# Altium PCB 咸味勺子.PcbDoc
Units mil, origin at the board's own origin, x right, y up, seen from the top; angles counter-clockwise.
Board outline 866.14 x 3005.27 mil, 2 copper layers (Top Layer, Bottom Layer); 64 components, 38 nets, 194 pads, 25 vias.
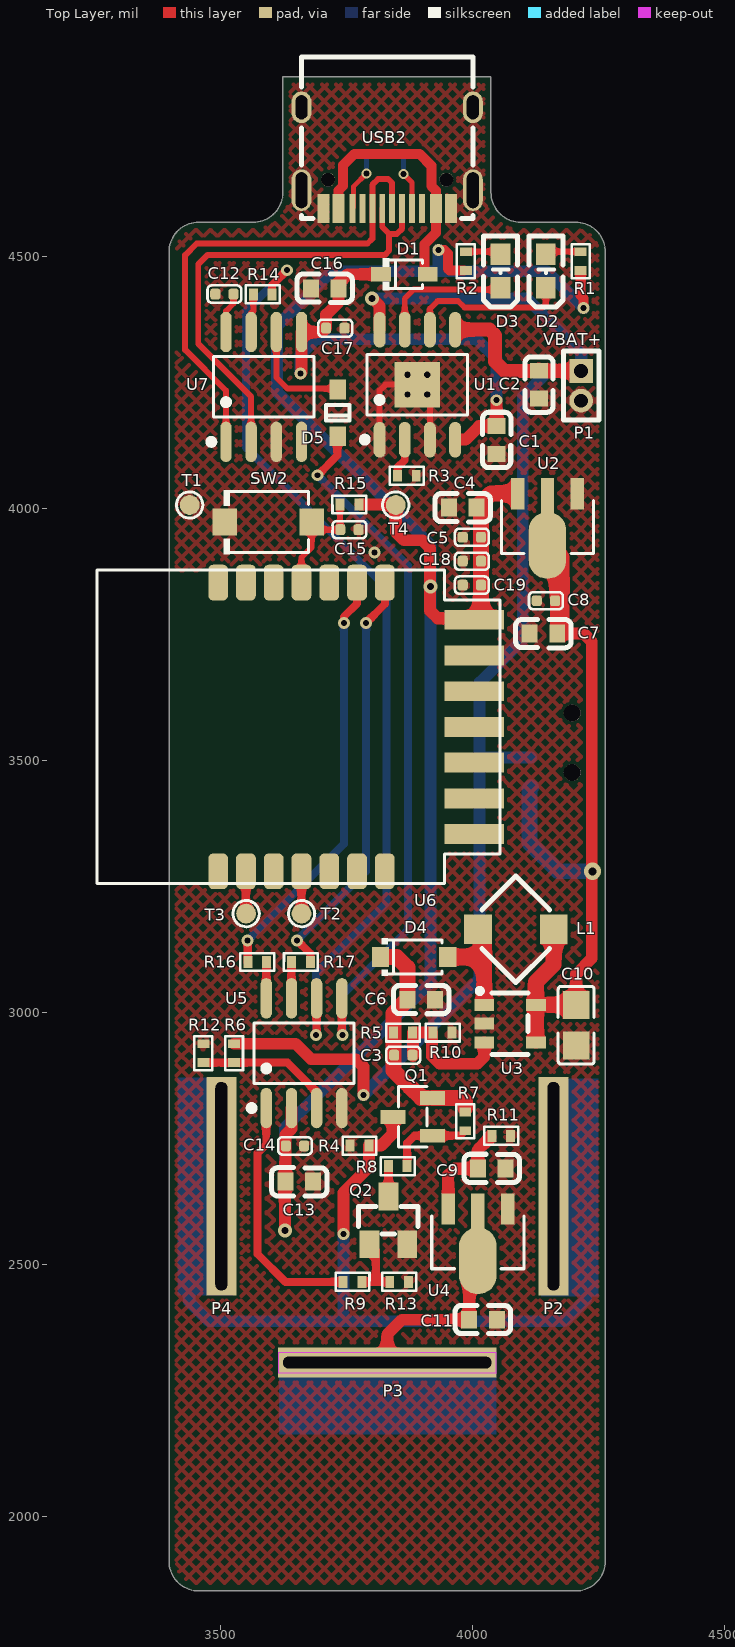
[diagram p0: Top Layer view]
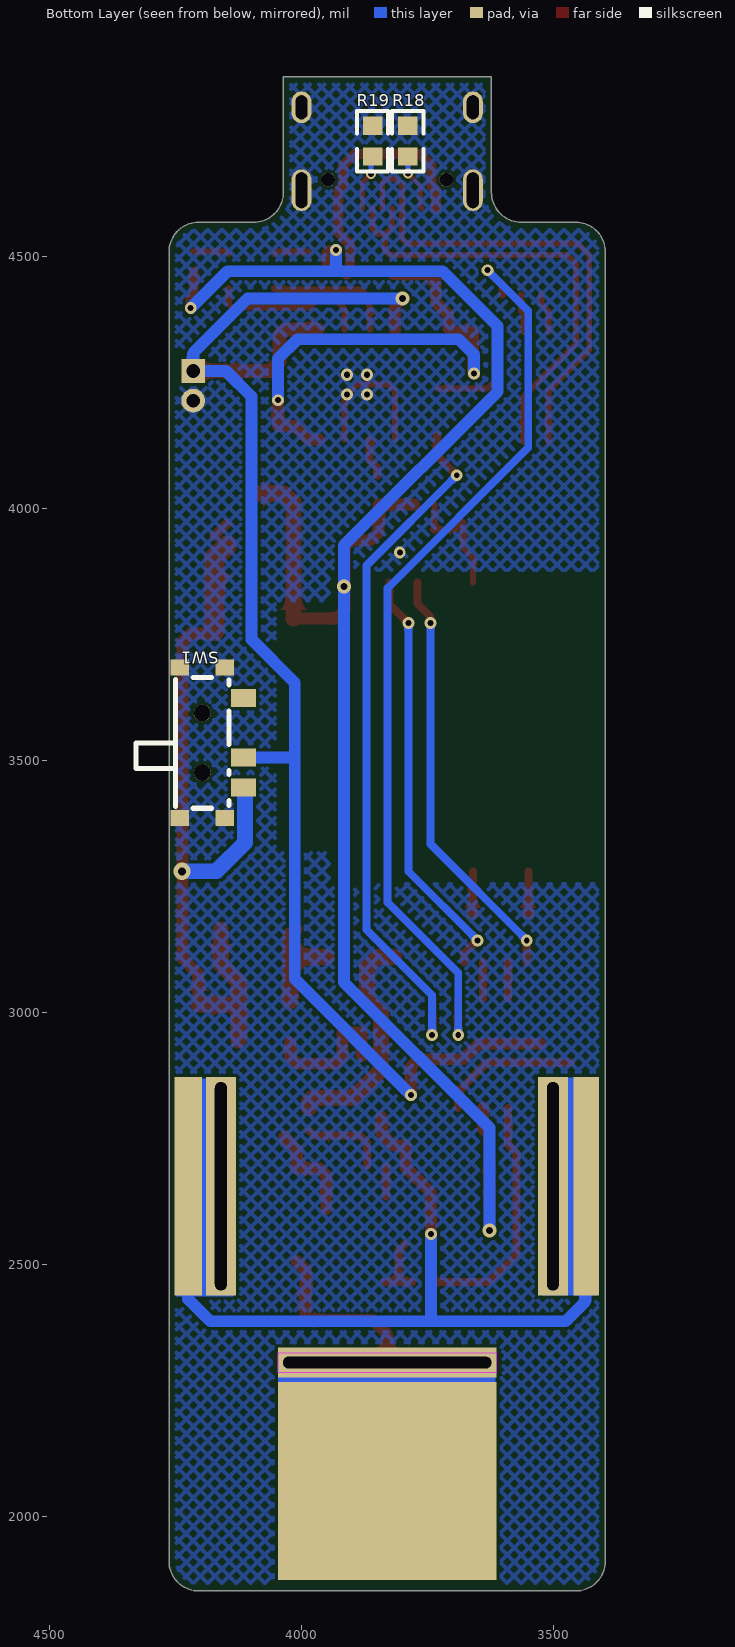
[diagram p1: Bottom Layer view, seen from below]
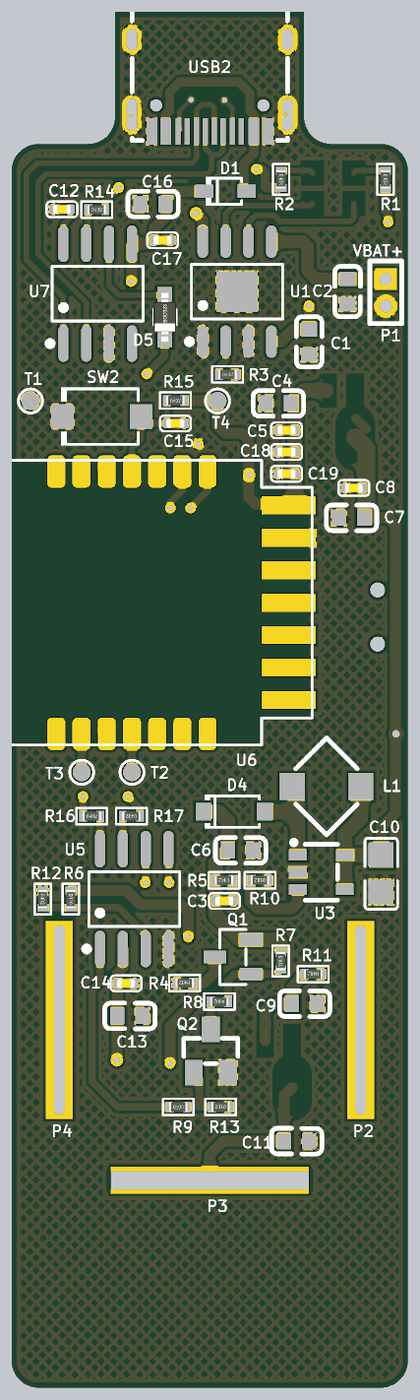
[diagram p2: 3D render of the assembled board from above, using the file's embedded part models]

## Layer stack, top to bottom
Top Solder: solder mask 0.4, Solder Resist, Dk 3.5
Top Layer: signal copper 1.4
Dielectric 1: dielectric 12.6, FR-4, Dk 4.8
Bottom Layer: signal copper 1.4
Bottom Solder: solder mask 0.4, Solder Resist, Dk 3.5

## Board outline
3396.93,1910.79 3396.93,4509.21 cw(c3455.98,4509.21) 3455.98,4568.27 3563.94,4568.27 ccw(c3563.94,4627.32) 3623,4627.32 3623,4857 4036,4857 4036,4627.32 ccw(c4095.06,4627.32) 4095.06,4568.27 4204.02,4568.27 cw(c4204.02,4509.21) 4263.07,4509.21 4263.07,1910.79 cw(c4204.02,1910.79) 4204.02,1851.73 3455.98,1851.73 cw(c3455.98,1910.79)
cut-out: 3613.46,2284.8 4046.54,2284.8 4046.54,2324.17 3613.46,2324.17
cut-out: 3613.46,2284.8 4046.54,2284.8 4046.54,2324.17 3613.46,2324.17

## Design rules (kind name [scope] priority, off if disabled: settings)
BoardOutlineClearance [All] p1: gap=10 ignorepadtopadclearanceinfootprint=FALSE except(0: Arc-SplitContinuation Track-SplitContinuation SMDPad-SplitContinuation THPad-SplitContinuation Via-SplitContinuation Fill-SplitContinuation Poly-SplitContinuation Region-SplitContinuation Text-SplitContinuation)
Clearance outline [InPoly vs OnLayer('Keep-Out Layer')] p1: gap=10 ignorepadtopadclearanceinfootprint=FALSE except(0: Arc-Hole Track-Hole SMDPad-Hole THPad-Hole Via-Hole Fill-Hole Poly-Hole Region-Hole Text-Hole)
Clearance same-via [IsVia vs IsVia] p2: gap=0 ignorepadtopadclearanceinfootprint=FALSE except(3: SMDPad-Via; 6: Via-Via)
Clearance [All] p3: gap=6 ignorepadtopadclearanceinfootprint=FALSE except(0: Arc-Hole Track-Hole SMDPad-Hole THPad-Hole Via-Hole Fill-Hole Poly-Hole Region-Hole Text-Hole)
ComponentClearance [All] p1: gap=0 collisioncheckmode=3 verticalgap=0 showdistances=FALSE
MinimumSolderMaskSliver [All] p1: minsoldermaskwidth=3
PolygonConnect IsPad [All] p1: connectstyle=Direct reliefconductorwidth=10 reliefentries=4 polygonreliefangle="90 Angle" airgapwidth=10
PolygonConnect Other [All] p2: connectstyle=Direct reliefconductorwidth=10 reliefentries=4 polygonreliefangle="90 Angle" airgapwidth=10
RoomDefinition 咸味勺子-20210715 [InComponentClass('咸味勺子-20210715')] p1: confinementstyle=ConfineIn formatcopy=TRUE outline 0,0 2000,0 2000,1000 0,1000
RoutingVias [All] p1: holewidth=8 width=16 viastyle="Through Hole" minholewidth=7.87 minwidth=11.81 maxholewidth=23.62 maxwidth=39.37
SilkToSilkClearance [All] p1: silktosilkclearance=0.39
SilkToSolderMaskClearance [IsPad] p1: minsilkscreentomaskgap=0.39 clearancetoexposedcopper=TRUE
SolderMaskExpansion [All] p1: expansion=2
Width [All] p1: maxlimit=196.85 minlimit=6 preferedwidth=7
26 further rules are at their usual default settings.

## Components (designator, comment, footprint, x,y, rotation, side; value= is the part's Value field where it differs from the comment)
C1 "106" C0603 4047,4136 r270 top value=1uF/16V
C2 "10uF/16V" C0603 4131,4246 r270 top
C3 "22pF" C0402_GRM15 3861.89,2915 r0 top
C4 "106" C0603 3980,4002 r180 top
C5 "104" C0402_GRM15 3998,3943 r180 top
C6 "1uF" C0603 3897.56,3025 r0 top
C7 "106" C0603 4140,3752 r180 top
C8 "104" C0402_GRM15 4145,3817 r180 top
C9 "106" C0603 4037.44,2690 r0 top
C10 "4.7uF" JMK212BJ475KG-T 4218.57,3124.14 r90 top
C11 "106" C0603 4020,2390 r0 top
C12 "0.1uF/50V" C0402_GRM15 3506.89,4425.67 r180 top
C13 "22uF/16V" C0603 3655.44,2664 r180 top value=1uF/16V
C14 "0.1uF/16V" C0402_GRM15 3647,2735 r180 top value=0.1uF/50V
C15 "104/10V" C0402_GRM15 3755,3958 r0 top
C16 "10uF/16V" C0603 3706,4437 r0 top value=1uF/16V
C17 "0.1uF/16V" C0402_GRM15 3727,4358 r180 top value=0.1uF/50V
C18 "104" C0402_GRM15 3998,3895.5 r180 top
C19 "103" C0402_GRM15 3998,3848 r180 top
D1 "1N5819WS" 1N5819WS 3978.32,4458.41 r0 top
D2 "绿色" OSR50603C1E 6214,22885 r90 top
D3 "红色" OSR50603C1E 6124,22885 r90 top
D4 "MBR0530" MBR0530 3979.41,3052.9 r0 top
D5 "1N5819WS" SOD-323 3731.89,4190 r90 top
L1 "6.8uH" CDRH3D23NP-6R8PC 4223.96,3226.3 r45 top
P1 "锂电池" "1.5mm 2p接插件" 4215,4273 r270 top
P2 "CON1" 焊点1#1 4230,2635 r0 top
P3 "CON1" 焊点1#2 3855,2375 r90 top locked
P4 "CON1" 焊点1#1 3571,2635 r0 top
Q1 "AO3401A" AO3401A 3961.66,2769.51 r0 top
Q2 "CJ2312" CJ2312 3808.35,2482.05 r270 top
R1 "102" R0402 4214,4491 r270 top
R2 "102" R0402 3986,4491 r270 top
R3 "222" R0402 3869,4065 r0 top
R4 "10K" R0402 3775,2735.67 r180 top value=100K/1%
R5 "1.5M/%1" R0402 3861.3,2960 r180 top value=100K/1%
R6 "100K/1%" R0402 3526,2919 r90 top
R7 "103" R0402 3985,2783.7 r270 top
R8 "10K" R0402 3851,2695 r180 top value=100K/1%
R9 "103" R0402 3761.3,2465 r0 top
R10 "270k/%1" R0402 3940,2960 r180 top value=100K/1%
R11 "100K/1%" R0402 4056.3,2755 r180 top
R12 "100K/1%" R0402 3465,2919 r270 top
R13 "104" R0402 3853.7,2465 r180 top
R14 "100R" R0402 3583,4425 r0 top value=200R
R15 "104/1%" R0402 3754.97,4008 r0 top
R16 "100R" R0402 3572,3100 r0 top
R17 "100R" R0402 3658.7,3100 r180 top
R18 "5.1KΩ (5101) ±1%" 0603_R 3789.02,4729 r90 bottom
R19 "5.1KΩ (5101) ±1%" 0603_R 3859.1,4729 r90 bottom
SW1 "MK-12C02-G020" SW-SMD_MK-12C02-G020 4178.5,3535.05 r270 bottom
SW2 "TS-1088R" TS-1088R-02026 3514.21,4036.68 r180 top
T1 "TP" TP1 3752.62,3904.09 r0 top
T2 "TP" TP1 3974.62,3093.09 r0 top
T3 "TP" TP1 3864.62,3093.09 r0 top
T4 "TP" TP1 4161.62,3904.09 r0 top
U1 "XT2051Y2ASR-G" XT2051Y2ASR-G 3960,4149.91 r0 top
U2 "MD5333" MD5333 8677.58,11350.62 r90 top
U3 "TPS61040DBVR" TPS61040DBVR 3909.68,2967.61 r180 top
U4 "MD5333" MD5333 8539.58,9930.62 r90 top
U5 "STC8G1K08A-36I-SOP8" STC8G1K08A-36I-SOP8 3844.98,2899.93 r0 top
U6 "BTU" CBU1 3781.59,3282.5 r90 top locked value=CBU
U7 "CH340N" CH340N 3654.98,4157.33 r0 top
USB2 "TYPEC-304-BCP16" USB-C-SMD_TYPEC-304-BCP16 3830,4696 r180 top

## Footprints (in the part's own frame and the unit in brackets; to place one, negate y for a bottom-side part, rotate by r counter-clockwise, add the part's x,y. Pads: shape width x height; smd on the part's side, far side on the other; paste and mask are expansions set on the pad)
"1.5mm 2p接插件" [mm]
  rect 1.2x1.2 hole 0.7: 1(0,0)
  round 1.2 hole 0.7: 2(1.5,0)
  silkscreen extent -1.02,-0.89 2.47,0.89
1N5819WS [mm] "SOD323"
  rect 1x0.75 smd: 1(-4.072,0.167) 2(-1.727,0.167)
  silkscreen extent -3.98,-0.64 -2,0.97
0603_R [mm]
  rect 0.93x0.98 smd: 1(-0.77,0) 2(0.77,0)
  silkscreen extent -1.53,-0.79 1.54,0.79, body extent -0.85,-0.4 0.85,0.4, height 0.56
AO3401A [mm] "SOT-23"
  rect 1.25x0.7 smd: 1(-1.058,-0.364) 2(-1.058,1.536) 3(-3.058,0.586)
  silkscreen extent -2.78,-0.94 -1.33,2.11
C0402_GRM15 [mm] "适用Murata GRM15封装"
  rrect50% 0.508x0.55 smd paste+0 mask+0.051: 1(-0.46,0) 2(0.46,0)
  Top Layer pour cut-out: 0.864,-0.458 0.864,-0.152 0.48,-0.152 0.48,-0.457
  Top Layer pour cut-out: -0.152,0.432 0.152,0.432 0.152,-0.432 -0.152,-0.432
  Top Layer pour cut-out: 0.864,0.458 0.864,0.152 0.48,0.152 0.48,0.457
  Top Layer pour cut-out: -0.864,-0.458 -0.864,-0.152 -0.48,-0.152 -0.48,-0.457
  Top Layer pour cut-out: -0.864,0.458 -0.864,0.152 -0.48,0.152 -0.48,0.457
  silkscreen extent -0.85,-0.43 0.85,0.44, body extent -0.5,-0.25 0.5,0.25, height 0.5
C0603 [mm]
  rect 0.8x0.9 smd: 1(-0.7,0) 2(0.7,0)
  silkscreen extent -1.4,-0.7 1.4,0.72
CBU1 [mm]
  rrect50% 1.8x1 smd paste-1: 1(-0.063,7.291) 2(-0.063,5.891) 3(-0.063,4.491) 4(-0.063,3.091) 5(-0.063,1.691) 6(-0.063,0.291) 7(-0.063,-1.109) 15(14.491,-1.109) 16(14.491,0.291) 17(14.491,1.691) 18(14.491,3.091) 19(14.491,4.491) 20(14.491,5.891) 21(14.491,7.291)
  rect 1x3 smd paste-3: 8(1.814,-5.609) 9(3.614,-5.609) 10(5.414,-5.609) 11(7.214,-5.609) 12(9.014,-5.609) 13(10.814,-5.609) 14(12.614,-5.609)
  silkscreen extent -0.69,-6.91 15.11,13.39
CDRH3D23NP-6R8PC [mm] "6.8uH ±25% 0.75A   SMD"
  rect 1.5x1.4 smd rot 45: 1(-4.944,2.742) 2(-2.243,0.042)
  silkscreen extent -5.49,-0.51 -1.69,3.29
CH340N [mil] "SOP-8"
  oval 22.6x80.14 smd: 1(-144.98,-24.93) 2(-94.98,-24.93) 3(-44.98,-24.93) 4(5.02,-24.93) 5(5.02,193) 6(-44.98,193) 7(-94.98,193) 8(-144.98,193)
  silkscreen extent -180,-31 29,144
CJ2312 [mm] "SOT-23(SOT-23-3)"
  rect 1.4x1 smd: 1(-1.472,-0.339) 2(-1.472,1.561) 3(-3.872,0.611)
  silkscreen extent -3.37,-0.89 -1.97,2.11
JMK212BJ475KG-T [mm] "0805"
  rect 1.41x1.35 smd: 1(-4.832,0.345) 2(-2.772,0.345)
  silkscreen extent -5.77,-0.56 -1.84,1.25
MBR0530 [mm] "SOD-123"
  rect 0.88x0.99 smd: 1(-4.132,1.45) 2(-0.747,1.45)
  silkscreen extent -4.07,0.51 -1.03,2.39
MD5333 [mm] "SOT89-3"
  rect 1.575x0.672 smd: 1(-185.956,113.551) 3(-185.956,116.551)
  oval 3.372x1.898 smd: 2(-188.56,115.051)
  rect 1.833x0.672 smd: 2(-186.086,115.051)
  silkscreen extent -188.96,112.73 -186.31,117.38
OSR50603C1E [mil]
  rect 43x39 smd: 1(-18380,2069) 2(-18447,2069)
  silkscreen extent -18485,2035 -18344,2103
R0402 [mm]
  rect 0.45x0.6 smd paste+0 mask+0.051: 1(-0.475,0) 2(0.475,0)
  Top Layer pour cut-out: -0.889,-0.178 -0.889,-0.483 -0.509,-0.483 -0.509,-0.178
  Top Layer pour cut-out: -0.889,0.178 -0.889,0.483 -0.509,0.483 -0.509,0.178
  Top Layer pour cut-out: 0.889,-0.178 0.889,-0.483 0.509,-0.483 0.509,-0.178
  Top Layer pour cut-out: 0.889,0.178 0.889,0.483 0.509,0.483 0.509,0.178
  Top Layer pour cut-out: -0.189,-0.453 -0.189,0.452 0.19,0.452 0.19,-0.453
  silkscreen extent -0.85,-0.45 0.85,0.45, body extent -0.5,-0.25 0.5,0.25, height 0.35
SOD-323 [mm]
  rect 1x0.83 smd: 1(1.18,0) 2(-1.18,0)
  silkscreen extent -0.4,-0.6 0.4,0.6, body extent -1.35,-0.62 1.35,0.63, height 1.1
STC8G1K08A-36I-SOP8 [mil] "SOP8"
  oval 22.6x80.14 smd: 1(-254.98,-89.93) 2(-204.98,-89.93) 3(-154.98,-89.93) 4(-104.98,-89.93) 5(-104.98,128) 6(-154.98,128) 7(-204.98,128) 8(-254.98,128)
  silkscreen extent -290,-96 -81,79
SW-SMD_MK-12C02-G020 [mm]
  rect 0.9x1.25 smd: 1(-2.25,1.605) 2(0.75,1.605) 3(2.25,1.605)
  rect 0.8x0.93 smd: 4(3.8,0.665) 5(3.8,-1.605) 6(-3.8,-1.605) 7(-3.8,0.665)
  round 0.85 hole 0.85 unplated: ""(-1.5,-0.47) ""(1.5,-0.47)
  silkscreen extent -3.3,-3.82 3.3,0.88
TP1 [mm]
  round 1 smd: 1(-7.991,2.614)
  silkscreen extent -8.65,1.95 -7.33,3.28
TPS61040DBVR [mm] "SOT-23-5   DC-DC电源芯片"
  rect 1x0.6 smd: 1(-2.869,-1.204) 2(-2.869,-0.254) 3(-2.869,0.696) 4(-5.469,0.696) 5(-5.469,-1.204)
  silkscreen extent -5.07,-2.03 -2.52,1.3
TS-1088R-02026 [mm] "SMD,3x4x2.0mm"
  rect 1.23x1.36 smd: 1(-4.211,1.617) 2(0.159,1.617)
  silkscreen extent -4.05,0 0.23,3.23
USB-C-SMD_TYPEC-304-BCP16 [mm]
  oval 1x2.1 hole 0.6 slot 1.8 at 90 deg: 13(-4.32,1.633) 14(4.32,1.633)
  oval 1x1.6 hole 0.6 slot 1.2 at 90 deg: 15(-4.32,-2.547) 16(4.32,-2.547)
  rect 0.6x1.45 smd: A1B12(-3.225,2.547) A4B9(-2.45,2.547) B1A12(3.22,2.547) B4A9(2.45,2.547)
  rect 0.3x1.45 smd: A5(-1.25,2.547) A6(-0.25,2.547) A7(0.25,2.547) A8(1.25,2.547) B5(1.75,2.547) B6(0.75,2.547) B7(-0.75,2.547) B8(-1.75,2.547)
  round 0.7 hole 0.7 unplated: ""(-2.98,1.103) ""(2.98,1.103)
  silkscreen extent -4.32,-5.08 4.32,3.05
XT2051Y2ASR-G [mm]
  oval 0.6x1.8 smd: 1(-3.687,-0.336) 2(-2.417,-0.336) 3(-1.147,-0.336) 4(0.123,-0.336) 5(0.123,5.209) 6(-1.147,5.209) 7(-2.417,5.209) 8(-3.687,5.209)
  rect 2.29x2.29 smd: 9(-1.782,2.436)
  silkscreen extent -4.58,-0.49 0.74,3.96
焊点1#1 [mm]
  rect 1.5x11 hole 0.6 slot 10.5 at 90 deg: 1(-1.778,0.508)
焊点1#2 [mm]
  rect 1.5x11 hole 0.6 slot 10.5 at 90 deg: 1(-1.778,0.635)

## Part data
C1 C13 C16: library part 1.02.03.00181, "无极性电容", ALT_SYMBOLS=#N/A, ComponentLink2Description=三星MLCC.pdf, ComponentLink2URL=file:///\\172.16.246.8\lib-ad\DBlib\Datasheet\电容类资料\三星MLCC.pdf, Orcad Footprint=#N/A, Orcad Footprint Path=#N/A, Orcad Library=#N/A, Orcad Library Path=#N/A, Part Number=1.02.03.00181, 修改人=system, 制造商=三星(SAMSUNG), 制造商型号=CL10B105KO8NNNC, 器件高度=null, 安装方式=贴片, 工作温度=null, 更新时间="2021-03-25 10:51:02", 物料描述=瓷介电容;贴片;X7R;1UF;±10%;16V;0603, 物料状态=已发布, 物料生产状态=量产, 物料类目=瓷介电容, 物料通用性等级=高, 管脚数量=2
C2 C3 C4 C5 C6 C7 C8 C9 C11 C15 C18 C19: library part 1.02.05.00869, "无极性电容", Part Number=1.02.05.00869
C10: BOM_Manufacturer="TAIYO YUDEN", BOM_Manufacturer Part=JMK212BJ475KG-T, BOM_Supplier=LCSC, BOM_Supplier Part=C92788, nameAlias=Capacitance, spicePre=C, spiceSymbolName=JMK212BJ475KG-T
C12 C14 C17: library part 1.02.05.00834, "无极性电容", ALT_SYMBOLS=c0603,c0603a, ComponentLink2Description=null, ComponentLink2URL=null, Orcad Footprint=c0603,c0603a, Orcad Footprint Path=Z:\tuya_lib\footprint, Orcad Library=C, Orcad Library Path=Z:\tuya_lib\sch-lib\DISCRETE.OLB, Part Number=1.02.05.00834, 修改人=system, 制造商=华科, 制造商型号=0603B104K500CT, 器件高度=null, 安装方式=贴片, 工作温度=null, 更新时间="2021-03-25 10:51:02", 物料描述=瓷介电容;贴片;X7R;0.1UF;±10%;50V;0603, 物料状态=已发布, 物料生产状态=量产, 物料类目=瓷介电容, 物料通用性等级=高, 管脚数量=2
D1 D5: library part 1N5819WS_C1884554, BOM_JLCPCB Part Class="Extended Part", BOM_Manufacturer=YFW佑风微, BOM_Manufacturer Part=1N5819WS, BOM_Supplier=LCSC, BOM_Supplier Part=C1884554, Contributor=LCSC, spicePre=D, spiceSymbolName=1N5819WS_C1884554
D2 D3: library part 1.06.02.00452, "LED", Part Number=1.06.02.00452
D4: library part MBR0530_C475718, BOM_JLCPCB Part Class="Extended Part", BOM_Manufacturer=Shikues, BOM_Manufacturer Part=MBR0530, BOM_Supplier=LCSC, BOM_Supplier Part=C475718, Contributor=LCSC, spicePre=D, spiceSymbolName=MBR0530_C475718
L1: BOM_Manufacturer=Sumida, BOM_Manufacturer Part=CDRH3D23NP-6R8PC, BOM_Supplier=LCSC, BOM_Supplier Part=C323532, Contributor=LCSC, nameAlias=Inductance, spicePre=L, spiceSymbolName=CDRH3D23NP-6R8PC
P1: library part CON2, "Connector"
Q1: library part AO3401A_C700954, BOM_JLCPCB Part Class="Extended Part", BOM_Manufacturer=HUASHUO(华朔), BOM_Manufacturer Part=AO3401A, BOM_Supplier=LCSC, BOM_Supplier Part=C700954, Contributor=LCSC, spicePre=Q, spiceSymbolName=AO3401A_C700954
Q2: library part 1.06.11.00008, "N-Channel MOSFET", ComponentLink2Description=CJ2312.pdf, ComponentLink2URL=file:///\\172.16.246.8\lib-ad\DBlib\Datasheet\三极管资料\CJ2312.pdf, Orcad Footprint=sot23-3, Orcad Footprint Path=Z:\tuya_lib\footprint, Orcad Library=FETN_GSD, Orcad Library Path=?Z:\tuya_lib\sch-lib\DISCRETE.OLB, Part Number=1.06.11.00008, 修改人=system, 制造商=江苏长电, 制造商型号=CJ2312, 器件高度=1.15mm, 安装方式=贴片, 工作温度=null, 更新时间="2021-03-25 10:51:02", 物料描述=场效应管;N沟道;CJ2312;20V;5A;31.8MR/4.5V;SOT-23;贴片, 物料状态=已发布, 物料生产状态=量产, 物料类目=场效应管, 物料通用性等级=高, 管脚数量=3
R1 R2 R3 R14 R15 R16 R17: library part 1.01.01.00808, "电阻", Part Number=1.01.01.00808
  R14: ALT_SYMBOLS=r0603, ComponentLink2Description=厚生电阻规格书.pdf, ComponentLink2URL=file:///\\172.16.246.8\lib-ad\DBlib\Datasheet\电阻类\厚生电阻规格书.pdf, Orcad Footprint=r0603, Orcad Footprint Path=Z:\tuya_lib\footprint, Orcad Library=R, Orcad Library Path=Z:\tuya_lib\sch-lib\DISCRETE.OLB, 修改人=system, 制造商=厚声(UniOhm), 制造商型号=0603WAJ0201***, 器件高度=null, 安装方式=贴片, 工作温度=null, 更新时间="2021-03-25 10:51:02", 物料描述=普通电阻;200R;±5%;0603;1/10W;贴片;, 物料状态=已发布, 物料生产状态=量产, 物料类目=普通电阻, 物料通用性等级=中, 管脚数量=2
R4 R5 R8 R10: library part 100K/1%, "电阻"
R6 R11 R12: "电阻"
R7 R9 R13: library part RES-1, "RES"
R18 R19: library part "0603 5.1KΩ (5101) 1%", "贴片电阻", Package=0603, SuppliersPartNumber=C23186, ComponentLink1Description=供应商链接, ComponentLink1URL=http://www.szlcsc.com/product/details_23913.html, Supplier=LC
SW1: library part SW-MK-12C02-G020, BOM_JLCPCB Part Class="Extended Part", BOM_Manufacturer=G-Switch, BOM_Manufacturer Part=MK-12C02-G020, BOM_Supplier=LCSC, BOM_Supplier Part=C963206, Contributor=LCSC, spicePre=S, spiceSymbolName=MK-12C02-G020
SW2: library part TS-1088R-02026, BOM_Manufacturer=XUNPU, BOM_Manufacturer Part=TS-1088R-02026, BOM_Paste Type=expand, BOM_Supplier=LCSC, BOM_Supplier Part=C455280, Contributor=LCSC, spicePre=S, spiceSymbolName=TS-1088R-02026
U1: BOM_Manufacturer=NATLINEAR, BOM_Manufacturer Part=XT2051Y2ASR-G, BOM_Supplier=LCSC, BOM_Supplier Part=C236398, Contributor=LCSC, spicePre=U, spiceSymbolName=XT2051Y2ASR-G
U2 U4: BOM_JLCPCB Part Class="Extended Part", BOM_Manufacturer=明达微, BOM_Manufacturer Part=MD5333, BOM_Supplier=LCSC, BOM_Supplier Part=C2827936, Contributor=LCSC, spicePre=U, spiceSymbolName=MD5333
U3: BOM_JLCPCB Part Class="Basic Part", BOM_Manufacturer=TI, BOM_Manufacturer Part=TPS61040DBVR, BOM_Supplier=LCSC, BOM_Supplier Part=C7722, spicePre=U, spiceSymbolName=TPS61040DBVR
U5: BOM_JLCPCB Part Class="Extended Part", BOM_Manufacturer="STC Micro", BOM_Manufacturer Part=STC8G1K08A-36I-SOP8, BOM_Supplier=LCSC, BOM_Supplier Part=C915663, Contributor=LCSC, spicePre=U, spiceSymbolName=STC8G1K08A-36I-SOP8
U6: Part Number=0110, Component Type=Standard, Pin Count=21, Process=贴片, 制造商=Ϳѻ, 制造商型号=CBU, 描述=CBU
U7: BOM_Manufacturer="WCH(Jiangsu Qin Heng)", BOM_Manufacturer Part=CH340N, BOM_Paste Type=expand, BOM_Supplier=LCSC, BOM_Supplier Part=C506813, Contributor=LCSC, spicePre=U, spiceSymbolName=CH340N
USB2: BOM_JLCPCB Part Class="Extended Part", BOM_Manufacturer=XUNPU, BOM_Manufacturer Part=TYPEC-304-BCP16, BOM_Supplier=LCSC, BOM_Supplier Part=C720629, Contributor=LCSC, spicePre=U, spiceSymbolName=TYPEC-304-BCP16

## Free pads (board coordinates)
  rect 51.18x433.07 smd far side: 19(3435,2655)
  rect 433.07x393.7 smd far side: 19(3830,2070)
  rect 55.12x433.07 smd far side: 19(4225,2655)

## Via types
v1: diameter 23.62, hole 11.81, Top Layer to Bottom Layer, 15 vias
v2: diameter 24, hole 12, Top Layer to Bottom Layer, 4 vias
v3: diameter 27.56, hole 13.78, Top Layer to Bottom Layer, 3 vias
v4: diameter 20, hole 12, Top Layer to Bottom Layer, tented both sides, 2 vias
v5: diameter 34, hole 16, Top Layer to Bottom Layer, tented both sides, 1 vias

## Nets (pads, with @x,y where several pads share a name; then routed paths per layer and width w, separated by ;. In a path a pad name is that pad's centre, name@x,y a point inside that pad or via, vN(x,y) a via of type N, cw(c..) or ccw(c..) an arc to the next point about the centre after c; other vN are vias at no path point)
3V3: C4.1 C5.1 C13.2 C14.2 C18.1 C19.1 R1.2 R2.2 R15.2 T4.1 U2.3 U5.2 U6.14 | length 3920.8
  Top Layer w19.68: v1(3932,4513) 3944,4513 3951,4506 3951,4475 3953.4,4472.6 R2.2@3983,4472.6 ; R1.2@4214,4471 4214,4423 4220,4417 v1(4220,4398)
  Top Layer w23.62: v3(3627,2567) 3627,2663.11 C13.2 3627.89,2756.89 3640,2769 U5.2 ; R15.2@3777,4008 3846,4008 T4.1 3847,3953 3863,3937 3900,3937 3915,3922 3915,3797 3930,3782 U6.14@4016.11,3782
  Top Layer w31.5: U6.14@4016.11,3782 4016.11,4010.11 4036,4030 U2.3@4085,4030
  Bottom Layer w23.62: v3(3627,2567) 3627,2771 3916,3060 v3(3916,3845) 3916,3927 3611,4232 3611,4362 3720,4471 3934,4471 ; v1(3932,4513) 3932,4473 3934,4471 ; v1(4220,4398) 4147,4471 3934,4471
ADC: R6.1 R12.2 U5.3 | length 281.1
  Top Layer w15.75: R12.2 3631.7,2900.3 3690,2842 U5.3
BTU_RXD1: R16.1 U6.16 | length 846.1
  Top Layer w15.75: v1(3553,3143) 3553,3100.3 R16.1 ; v1@3744,3770 v1(3744,3773) 3744,3785 3770.12,3811.12 U6.16
  Bottom Layer w15.75: v1(3553,3143) 3744,3334 v1(3744,3773)
BTU_TXD1: R17.1 U6.15 | length 837
  Top Layer w15.75: v1(3651,3143) 3677.4,3116.6 R17.1 R17.1@3678,3100.6 ; v1(3788,3773) 3825.24,3810.24 U6.15
  Bottom Layer w15.75: v1(3651,3143) 3788,3280 v1(3788,3773)
D+: U7.1 USB2.A6 USB2.B6 | length 993.8
  Top Layer w11.81: U7.1 3510,4234 3429,4315 3429,4503 3452,4526 3791,4526 3800.47,4535.47 USB2.B6 3800.47,4642.47 3812,4654 3831.84,4654 3839.84,4646 USB2.A6
D-: U7.2 USB2.A7 USB2.B7 | length 945.7
  Top Layer w11.81: U7.2 3560,4222 3455,4327 3455,4485 3473,4503 3824.85,4503 3834,4512.15 3834,4545 ; USB2.A7 3820.16,4558.84 3834,4545 ; USB2.B7 3859.53,4555.56 3848.97,4545 3834,4545
GND: C1.2 C2.2 C4.2 C5.2 C6.2 C7.2 C8.2 C9.2 C10.1 C11.2 C12.2 C13.1 C14.1 C15.2 C16.1 C17.1 C18.2 C19.2 P1.2 Q2.2 R3.2 R4.2 R10.1 R11.1 R12.1 R13.1 R18.2 R19.2 SW1.4 SW1.5 SW1.6 SW1.7 SW2.2 T1.1 U1.1 U1.3 U1.9 U2.1 U3.2 U4.1 U5.4 U6.13 U7.3 USB2.13 USB2.14 USB2.15 USB2.16 USB2.A1B12 USB2.B1A12 | length 296.6
  Top Layer w11.81: U1.1 3814.83,4233.83 3826.82,4245.82 U1.9 3914.83,4220.82 U1.3
  other v1: 3805,3913
  other v2: 3870.15,4226.13 3909.52,4226.13 3870.15,4265.5 3909.52,4265.5
LED1: D2.2 U1.6 | length 318.6
  Top Layer w11.81: U1.6 3914.83,4396.83 3930,4412 3970.62,4412 3983.62,4399 4138,4399 4145,4406 D2.2
LED2: D3.2 U1.7 | length 263.4
  Top Layer w11.81: U1.7@3863,4356.8 U1.7 3864.83,4416.83 3882.33,4434.33 4051.33,4434.33 D3.2
NetC3_2: C3.2 R5.1 R10.2 U3.3 | length 272.6
  Top Layer w23.62: C3.2@3881,2913.44 R5.1@3881,2960 ; R5.1@3883,2960 R10.2@3918,2960 ; R10.2@3919,2960 3919,2913 3934,2898 4009,2898 4022.63,2911.63 U3.3
NetC9_1: C9.1 R11.2 U4.3 | length 205
  Top Layer w23.62: U4.3 3950.95,2676.95 3964,2690 C9.1 4009.89,2727.29 R11.2@4035.3,2752.7
NetC11_1: C11.1 P3.1 pad.19@3830,2070 U4.2 | length 356.2
  Top Layer w15.75: P3.1 P3.1@3831.05,2306.05
  Top Layer w23.62: P3.1 3830,2361 3859,2390 C11.1 3992.44,2489.44 U4.2@4010,2507
NetC12_1: C12.1 U7.8 | length 81.6
  Top Layer w11.81: U7.8 3510,4391.88 3525,4406.88 C12.1
NetD2_1: D2.1 R1.1 | length 72.1
  Top Layer w11.81: D2.1 4150,4510 R1.1@4215,4510
NetD3_1: D3.1 R2.1 | length 71.1
  Top Layer w11.81: R2.1@3986,4510 4050,4510 D3.1
NetD4_2: D4.2 L1.1 U3.1 | length 221.9
  Top Layer w23.62: L1.1 L1.1@4022.64,3152.36
  Top Layer w31.5: D4.2 4022.64,3110 ; U3.1@4022.64,3021 4022.64,3110 ; L1.1@4022.64,3152.36 4022.64,3110
NetD5_1: D5.1 U7.6 | length 220.4
  Top Layer w11.81: U7.6 3610,4260 3632,4238 D5.1@3731,4238
NetQ1_1: Q1.1 R7.2 R8.1 | length 171.1
  Top Layer w15.75: R8.1 3869.7,2740.7 3884.2,2755.2 Q1.1 3975.2,2755.2 R7.2
NetQ2_1: Q2.1 R9.2 R13.2 | length 135.2
  Top Layer w15.75: R9.2 3807.5,2465 ; Q2.1 3807.5,2527.5 3807.5,2465 ; R13.2 3807.5,2465
NetQ2_3: Q2.3 R8.2 | length 60.6
  Top Layer w15.75: R8.2 3832.4,2694.9 Q2.3
NetR3_1: R3.1 U1.2 | length 83.1
  Top Layer w15.75: R3.1 3850.3,4081.3 3864.83,4095.83 U1.2 U1.2@3860.97,4132.8
NetR14_1: R14.1 U7.7 | length 76.4
  Top Layer w11.81: U7.7 3560,4388 3564.3,4392.3 R14.1
NetR18_1: R18.1 USB2.B5 | length 114.5
  Top Layer w10: USB2.B5 3763.46,4598.06 3763.46,4639.36 v4(3789,4664.9)
  Bottom Layer w10: v4(3789,4664.9) R18.1
NetR19_1: R19.1 USB2.A5 | length 111.3
  Top Layer w10: v4(3862.21,4664) 3879.21,4647 USB2.A5
  Bottom Layer w10: R19.1 3862.21,4695.58 v4(3862.21,4664)
P5.4: R9.1 U5.1 | length 489.4
  Top Layer w15.75: U5.1 3590,2738 3573,2721 3573,2520 3628,2465 R9.1
PD7: T3.1 U6.2 | length 84.2
  Top Layer w15.75: T3.1@3549.65,3196.35 U6.2
  Top Layer w23.62: T3.1@3549.65,3196.35 T3.1
RESETB: C15.1 R15.1 SW2.1 U6.18 | length 241.7
  Top Layer w11.81: U6.18 3659.88,3902.88 3680,3923 SW2.1 3695,3958 C15.1 ; C15.1@3736.27,3958.62 R15.1
  Top Layer w15.75: C15.1@3736.27,3958.62 C15.1
RXD: D5.2 U5.5 | length 1410.2
  Top Layer w15.75: v1@3694,4066 v1(3692,4066) 3731,4105 D5.2@3731,4145.67 ; U5.5 3740,2956 v1(3741,2955)
  Bottom Layer w15.75: v1(3692,4066) 3871,3887 3871,3164 3741,3034 v1(3741,2955)
RXD1: R17.2 U5.7 | length 72.1
  Top Layer w15.75: U5.7 R17.2
SWS: T2.1 U6.4 | length 84.1
  Top Layer w15.75: T2.1@3659.88,3196.12 U6.4
  Top Layer w23.62: T2.1@3659.88,3196.12 T2.1
TXD: R14.2 U5.6 | length 1858.6
  Top Layer w15.75: R14.2 3601.7,4443.7 v1(3631,4473) ; v1(3689,2955) 3690,2956 U5.6
  Bottom Layer w15.75: v1(3631,4473) 3550,4392 3550,4121 3829,3842 3829,3218 3689,3078 v1(3689,2955)
TXD1: R16.2 U5.8 | length 72.1
  Top Layer w15.75: U5.8 R16.2@3590,3100
USB_5V: C1.1 C16.2 C17.2 D1.1 U1.4 U7.5 | length 1009
  Top Layer w23.62: v1(3658,4268) 3660,4270 U7.5 3701.22,4350.33 C17.2 3708.89,4384.89 3733.56,4409.56 C16.2 3733.56,4447.56 3751,4465 D1.1 ; U1.4 3985.66,4136.66 4012.56,4163.56 C1.1 v1(4047,4215)
  Bottom Layer w23.62: v1(3658,4268) 3658,4306 3688,4336 4008,4336 4047,4297 v1(4047,4215)
USB_VCC: D1.2 USB2.A4B9 USB2.B4A9 | length 514.5
  Top Layer w20: USB2.B4A9 3733.55,4631.34 3742.46,4640.25 3742.46,4681.46 3765,4704 3894,4704 3917.55,4680.45 3917.55,4640.25 3926.46,4631.35 USB2.A4B9 3926.46,4546.79 3904.19,4524.52 3904.19,4471.14 D1.2
V_OUT: P2.1 P4.1 pad.19@3435,2655 pad.19@4225,2655 Q1.3 R4.1 | length 1821.1
  Top Layer w23.62: v1(3743,2560) 3743,2642 3793.7,2692.7 R4.1 3817.67,2735.67 3841.26,2759.26 Q1.3
  Bottom Layer w23.62: pad.19@3435,2655 3437,2655 3437,2426 3476,2387 3744,2387 ; v1(3743,2560) 3743,2388 3744,2387 ; P2.1 pad.19@4219,2655 ; pad.19@4219,2673 pad.19@4219,2655 ; 3744,2387 4181,2387 4225,2431 4225,2655 pad.19@4219,2655
VBAT: C2.1 P1.1 R6.2 SW1.2 U1.5 U1.8 | length 2971.9
  Top Layer w23.62: R6.2 3648.3,2937.7 3679,2907 3768,2907 3783,2892 v1(3783,2836) ; v3(3800,4417) 3814.83,4402.17 U1.8 ; C2.1@4130,4278 4131,4278 4136,4273 4131.56,4273 C2.1
  Top Layer w27.56: U1.5@3968,4354.97 4033.03,4354.97 4044,4344 4044,4292 4063,4273 C2.1@4131.56,4273 ; C2.1@4136,4273 P1.1
  Bottom Layer w23.62: v1(3783,2836) 4013.53,3066.53 4013.53,3505.53 ; v3(3800,4417) 4107,4417 4215,4309 P1.1 4150,4273 4099,4222 4099,3740 4013.53,3654.53 4013.53,3505.53 ; SW1.2 4013.53,3505.53
VBAT_BOOST_8V: C3.1 C6.1 D4.1 Q1.2 R5.2 R7.1 | length 448.8
  Top Layer w31.5: D4.1 3849,3110 3870,3089 C6.1 3842.6,2997.6 3842.6,2884.4 3897,2830 Q1.2@3910,2830 ; Q1.2 3978,2830 3985,2823 R7.1@3985,2810
VBAT_OUT: C7.1 C8.1 C10.2 L1.2 SW1.3 U2.2 U3.4 U3.5 | length 1589.2
  Top Layer w19.68: U2.2@4149,3969 U2.2@4172.56,3945.44
  Top Layer w23.62: C7.1@4172.56,3752 4220,3752 4236,3736 4236,3578.74 4236,3107 4205,3076 C10.2
  Top Layer w31.5: U3.4@4125,2944 U3.5 C10.2 ; U3.5@4125,3019 4125,3060 4160.34,3095.34 L1.2
  Top Layer w39.37: U2.2@4148,3927 4172.56,3902.44 C7.1@4172.56,3756.44
  Bottom Layer w31.5: SW1.3 4112.26,3443.43 4112.26,3336.74 4169,3280 v5(4237.32,3280)
pads on no net: SW1. SW1.1 U6.1 U6.3 U6.5 U6.6 U6.7 U6.8 U6.9 U6.10 U6.11 U6.12 U6.17 U6.19 U6.20 U6.21 U7.4 USB2. USB2.A8 USB2.B8

## Polygon pours and split planes (outlines as drawn)
GND on Top Layer (hatched 45Degree grid 20 track 8, remove dead copper, pour order 3): 3396.93,1910.79 ccw(c3455.98,1910.79) 3455.98,1851.73 4204.02,1851.73 ccw(c4204.02,1910.79) 4263.07,1910.79 4263.07,4509.21 ccw(c4204.02,4509.21) 4204.02,4568.27 4095.06,4568.27 cw(c4095.06,4627.32) 4036,4627.32 4036,4857 3623,4857 3623,4627.32 cw(c3563.94,4627.32) 3563.94,4568.27 3455.98,4568.27 ccw(c3455.98,4509.21) 3396.93,4509.21
GND on Bottom Layer (hatched 45Degree grid 20 track 8, remove dead copper, pour order 1): 3396.93,1910.79 ccw(c3455.98,1910.79) 3455.98,1851.73 4204.02,1851.73 ccw(c4204.02,1910.79) 4263.07,1910.79 4263.07,4509.21 ccw(c4204.02,4509.21) 4204.02,4568.27 4095.06,4568.27 cw(c4095.06,4627.32) 4036,4627.32 4036,4857 3623,4857 3623,4627.32 cw(c3563.94,4627.32) 3563.94,4568.27 3455.98,4568.27 ccw(c3455.98,4509.21) 3396.93,4509.21

## Other copper
Top Layer:
  pour cut-out: 3255,3879 3257,3877 3944,3877 3944,3818 4052,3818 4052,3317 4053,3316 4052,3315 3946,3315 3946,3261 3939,3254 3252,3254 3252,3876
Bottom Layer:
  rectangle net V_OUT: 4135,2436 4249,2869
  rectangle net V_OUT: 3414,2438 3524,2871
  rectangle net NetC11_1: 3802,2249 3803,2316
  rectangle net NetC11_1: 3615,2162 4047,2315
  pour cut-out: 3256,3877 3257,3878 3946,3878 3946,3818 3945,3817 4053,3817 4053,3317 4054,3316 3946,3316 3946,3255 3945,3254 3944,3255 3254,3255 3254,3877 3252,3879

## Silkscreen, mask and mechanical layers (free items; w line width, h text height)
Top Overlay:
  text "VBAT+" at 4140,4324 h23.62
Mechanical 1:
  lines w0.5: 3396.93,1910.79 ccw(c3455.98,1910.79) 3455.98,1851.73 4204.02,1851.73 ccw(c4204.02,1910.79) 4263.07,1910.79 4263.07,4509.21 ccw(c4204.02,4509.21) 4204.02,4568.27 4095.06,4568.27 cw(c4095.06,4627.32) 4036,4627.32 4036,4857 3623,4857 3623,4627.32 cw(c3563.94,4627.32) 3563.94,4568.27 3455.98,4568.27 ccw(c3455.98,4509.21) 3396.93,4509.21 3396.93,1910.79 ; 3613.46,2284.8 4046.54,2284.8 4046.54,2324.17 3613.46,2324.17 3613.46,2284.8